# EAGLE board TAG_connect (EAGLE 6.3)
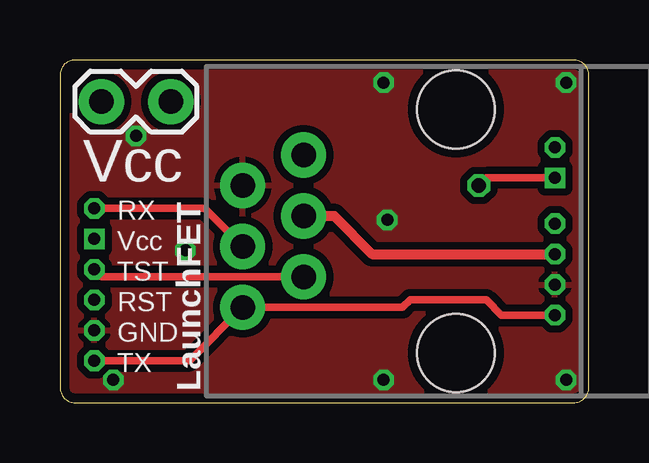
[diagram p0: board, top side]
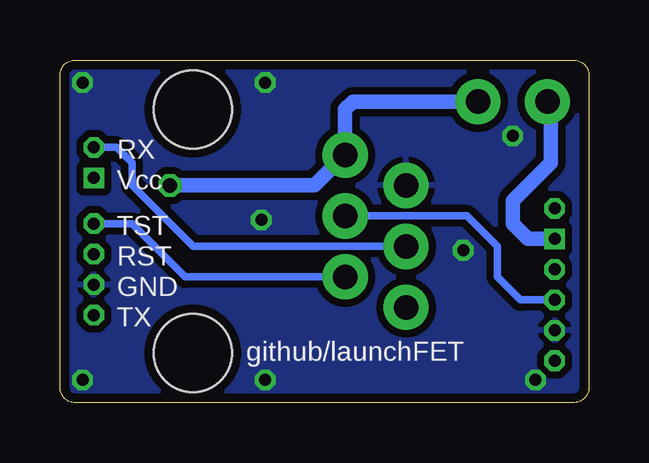
[diagram p1: board, bottom side, seen from below]

Size 22.05 x 14.28 mm. Coordinates in mm from the lower left corner, seen from the top.
Outline: 0,13.64 0,0.63 arc90 0.63,0 21.42,0 arc90 22.05,0.63 22.05,13.64 arc90 21.42,14.28 0.63,14.28 arc90 0,13.64
Copper layers (1*16): Top 0.0356mm / dielectric 1.5011mm / Bottom 0.0356mm
Design rules "LaenPCBOrder *": minimum track width 6mil, minimum drill 13mil, track to track 6mil, track to pad 6mil, pad to pad 6mil, via to via 6mil, smd to smd 6mil, copper to edge 15mil, drill to drill 6mil, minimum pad ring 7mil, minimum via ring 7mil, stop-mask expansion 4mil, vias tented up to drill 20mil, thermal gap 10mil

## Footprints (pad centres in the part's own frame; a part is rotated, then mirrored left to right if it is on the bottom)
RJ11-6 = drill 1.016 pad 1.88: 1 1.905,8.89; 2 3.175,6.35; 3 4.445,8.89; 4 5.715,6.35; 5 6.985,8.89; 6 8.255,6.35 | hole 3.251: 0,0; 10.16,0
1X02_LOCK = drill 1.016 pad 1.88: 1 -0.178,0; 2 2.718,0
EASYMSP-6PIN = drill 0.5 octagon: GND 0,-1.27; RST 0,0; RX 0,3.81; TST 0,1.27; TX 0,-2.54 | drill 0.5 square: VCC 0,2.54
SAFEMSP-6PIN = drill 0.5 octagon: GND 0,-1.27; RST 0,0; RX 0,4.445; TST 0,1.27; TX 0,-2.54 | drill 0.5 square: VCC 0,3.175

## Placement (x,y rotation side)
J2  RJ11-6PTH  [RJ11-6]  16.51,2.06 90 top
JP2  [1X02_LOCK]  4.44,12.54 180 top
U$4  6-PIN-ICSPEASY-MSP  [EASYMSP-6PIN]  1.43,4.29 0 top
U$5  6-PIN-ICSPSAFE-MSP  [SAFEMSP-6PIN]  20.64,6.19 0 bottom

## Library data of the parts
J2 = SparkFun-Connectors
JP2 = SparkFun-Passives
U$4 U$5 = LaunchFET

## Nets
GND: J2.5 U$4.GND U$5.GND
RESET: J2.4 U$4.RST U$5.RST
RX: J2.3 U$4.RX U$5.RX
TEST: J2.2 U$4.TST U$5.TST
TX: J2.1 U$4.TX U$5.TX
VCC_FET: JP2.2 U$4.VCC
VCC_TARGET: J2.6 JP2.1 U$5.VCC

## Tracks (layer width: path | path; a pad name or v marks a point on that pad's centre or on a via)
GND  (via drill 0.5)
  other vias: 2.22,0.95 13.49,0.95 21.11,0.95 21.11,13.34 13.49,13.34 3.17,11.11 13.65,7.62 5.24,6.35
  pour Bottom (isolate 0.305): 21.75,13.97 0.32,13.97 0.32,0.32 21.75,0.32
  pour Top (isolate 0.305): 21.75,13.97 0.32,13.97 0.32,0.32 21.75,0.32
RESET
  Top 0.406: J2.4 11.43,7.78 13.02,6.19 U$5.RST
  Bottom 0.305: U$4.RST 2.86,4.29 3.81,5.24 3.81,6.51 5.08,7.78 J2.4
RX
  Top 0.305: U$4.RX 6.03,8.1 J2.3
  Bottom 0.305: J2.3 16.51,6.51 19.05,9.05 19.05,10 19.68,10.64 U$5.RX
TEST
  Top 0.305: J2.2 1.75,5.24 U$4.TST
  Bottom 0.305: J2.2 16.83,5.24 19.05,7.46 U$5.TST
TX
  Top 0.305: U$4.TX 5.4,1.75 J2.1 14.29,3.97 14.61,4.29 17.78,4.29 18.41,3.65 U$5.TX
VCC_FET
  Bottom 0.61: U$4.VCC 2.54,6.83 3.17,7.46 3.17,8.41 1.59,10 1.59,12.4 JP2.2
VCC_TARGET  (via drill 0.6)
  Top 0.305: U$5.VCC 17.78,9.37 v17.46,9.05
  Bottom 0.61: JP2.1 9.84,12.54 10.16,12.22 J2.6 11.43,9.05 v17.46,9.05

## Text on the board
_tsilk: Vcc | LaunchFET
_bsilk: github/launchFET